# Altium PCB RelayBord.PcbDoc (part 2 of 2)
Units mm, origin at the board's own origin, x right, y up, seen from the top; angles counter-clockwise.
Board outline 155 x 100 mm, 2 copper layers (Top Layer, Bottom Layer); 259 components, 185 nets, 772 pads, 92 vias.
Unrouted connection lines stored in the file: 1.
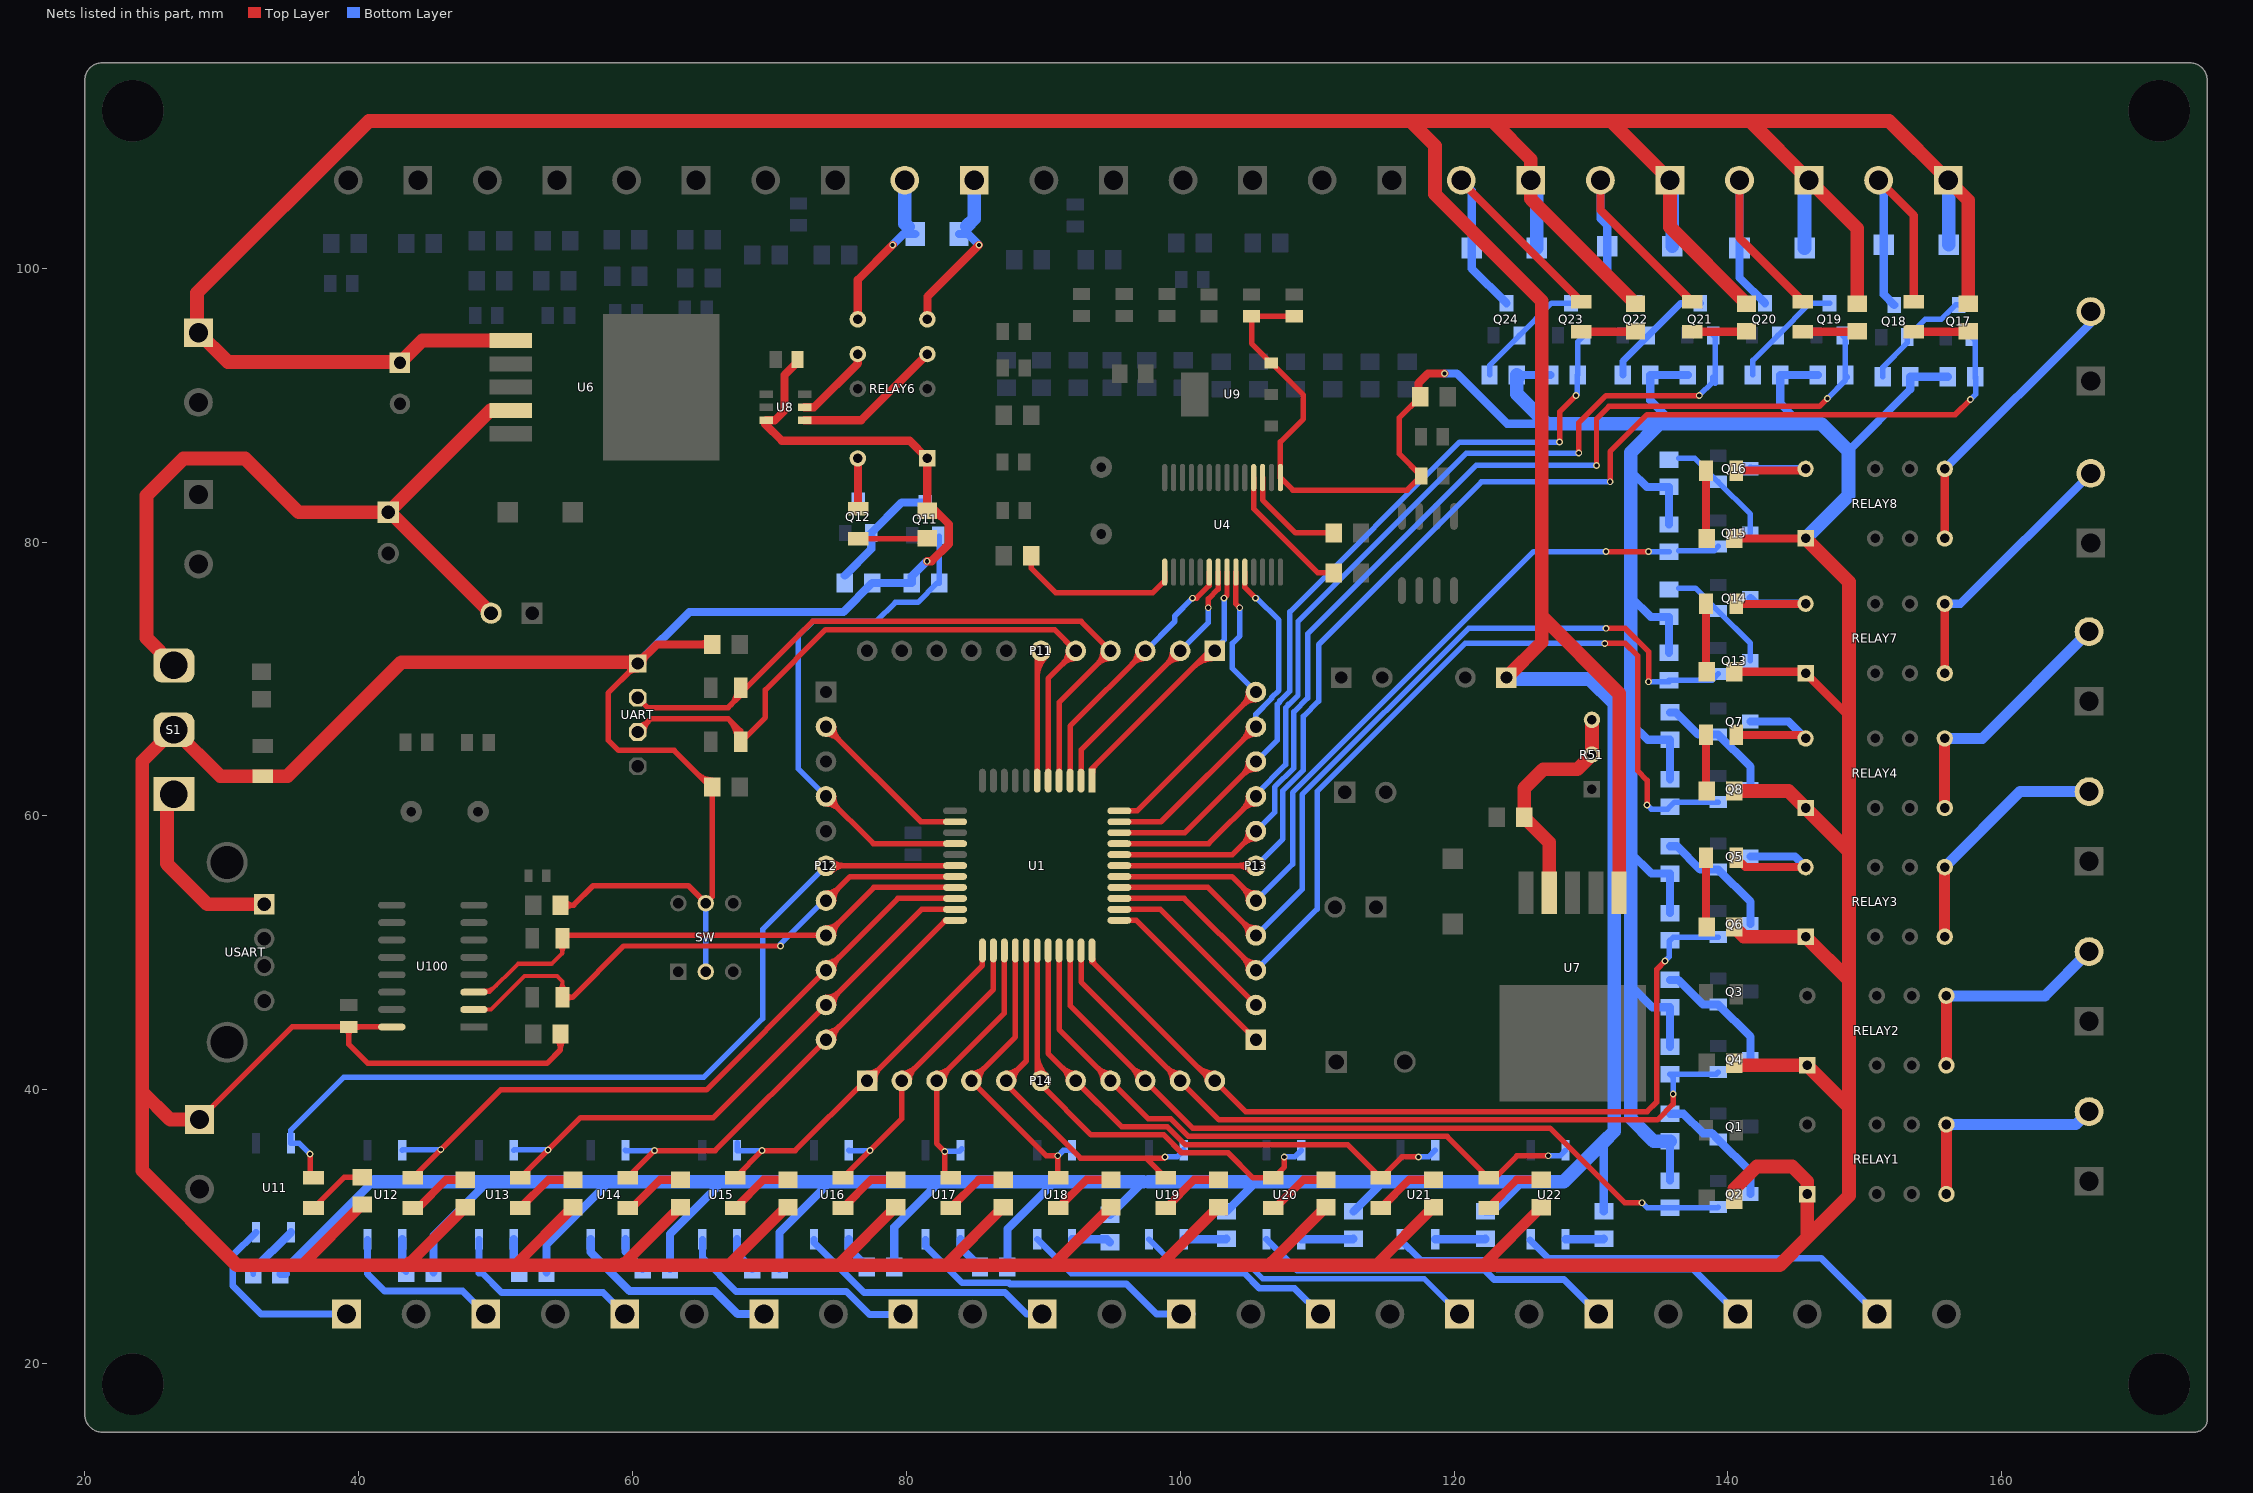
[diagram p2: the nets of this part, all layers, seen from the top]

## Via types
v1: diameter 0.5, hole 0.3, Top Layer to Bottom Layer, 70 vias
v2: diameter 0.4, hole 0.3, Top Layer to Bottom Layer, 18 vias
v3: diameter 2, hole 2, Top Layer to Bottom Layer, 4 vias

## Nets (pads, with @x,y where several pads share a name; then routed paths per layer and width w, separated by ;. In a path a pad name is that pad's centre, name@x,y a point inside that pad or via, vN(x,y) a via of type N, cw(c..) or ccw(c..) an arc to the next point about the centre after c; other vN are vias at no path point) (continued)
NetLED602_1: LED602.1 R13.1 | length 5.1
  Top Layer w0.6: LED602.1@138.402,56.928 138.402,51.939 R13.1@138.462,51.879
NetLED602_2: LED602.2 Q5.3 RELAY3.1 | length 9.7
  Top Layer w0.6: LED602.2@140.602,56.928 141.269,56.261 RELAY3.1@145.669,56.261
  Bottom Layer w0.6: Q5.3@141.637,57.035 144.895,57.035 RELAY3.1@145.669,56.261
NetLED603_1: LED603.1 R14.1 | length 4.1
  Top Layer w0.6: LED603.1@138.402,65.913 138.402,61.877 R14.1@138.462,61.817
NetLED603_2: LED603.2 Q7.3 RELAY4.1 | length 9.7
  Top Layer w0.6: LED603.2@140.602,65.913 145.415,65.913 RELAY4.1@145.669,65.659
  Bottom Layer w0.6: Q7.3@141.637,66.894 144.434,66.894 RELAY4.1@145.669,65.659
NetLED605_1: LED605.1 R16.2 | length 5
  Top Layer w0.4: LED605.1@76.476,80.233 R16.2@81.475,80.233
NetLED605_2: LED605.2 Q12.3 RELAY6.1 | length 6.6
  Top Layer w0.6: LED605.2@76.476,82.433 RELAY6.1@76.476,86.029
  Bottom Layer w0.4: Q12.3@76.486,83.009 RELAY6.1@76.486,86.039
NetLED606_1: LED606.1 R17.2 | length 5
  Top Layer w0.6: LED606.1@138.402,75.478 138.402,70.579 R17.2@138.452,70.529
NetLED606_2: LED606.2 Q14.3 RELAY7.1 | length 9.3
  Top Layer w0.6: LED606.2@140.602,75.478 145.646,75.478 RELAY7.1@145.669,75.501
  Bottom Layer w0.6: Q14.3@141.639,75.909 142.046,75.501 RELAY7.1@145.669,75.501
NetLED607_1: LED607.1 R18.2 | length 5
  Top Layer w0.6: LED607.1@138.402,85.217 138.402,80.318 R18.2@138.452,80.268
NetLED607_2: LED607.2 Q16.3 RELAY8.1 | length 9.2
  Top Layer w0.6: LED607.2@140.602,85.217 145.542,85.217 RELAY8.1@145.669,85.344
  Bottom Layer w0.6: Q16.3@141.639,85.348 141.643,85.344 RELAY8.1@145.669,85.344
NetLED608_1: LED608.1 R19.2 | length 3.9
  Top Layer w0.6: LED608.1@153.575,95.359 R19.2@157.493,95.359
NetLED609_1: LED609.1 R20.2 | length 3.9
  Top Layer w0.6: LED609.1@145.479,95.359 R20.2@149.397,95.359
NetLED610_1: LED610.1 R21.2 | length 3.9
  Top Layer w0.6: LED610.1@137.382,95.359 R21.2@141.301,95.359
NetLED611_1: LED611.1 R22.2 | length 3.9
  Top Layer w0.6: LED611.1@129.286,95.359 R22.2@133.204,95.359
NetLED720_1: LED720.1 R720.2 | length 4.5
  Top Layer w0.4: LED720.1@36.703,31.369 38.957,33.623 R720.2@40.259,33.623
NetLED721_1: LED721.1 R721.2 | length 4.7
  Top Layer w0.6: LED721.1@43.942,31.369 44.323,31.369 46.383,33.429 R721.2@47.791,33.429
NetLED722_1: LED722.1 R722.2 | length 4.7
  Top Layer w0.6: LED722.1@51.799,31.369 53.859,33.429 R722.2@55.648,33.429
NetLED723_1: LED723.1 R723.2 | length 4.7
  Top Layer w0.6: LED723.1@59.657,31.369 59.944,31.369 62.004,33.429 R723.2@63.506,33.429
NetLED724_1: LED724.1 R724.2 | length 4.7
  Top Layer w0.6: LED724.1@67.514,31.369 69.574,33.429 R724.2@71.363,33.429
NetLED725_1: LED725.1 R725.2 | length 4.7
  Top Layer w0.6: LED725.1@75.372,31.369 77.432,33.429 R725.2@79.22,33.429
NetLED726_1: LED726.1 R726.2 | length 4.7
  Top Layer w0.6: LED726.1@83.229,31.369 85.289,33.429 R726.2@87.078,33.429
NetLED727_1: LED727.1 R727.2 | length 4.7
  Top Layer w0.6: LED727.1@91.087,31.369 93.147,33.429 R727.2@94.935,33.429
NetLED728_1: LED728.1 R728.2 | length 4.7
  Top Layer w0.6: LED728.1@98.944,31.369 101.004,33.429 R728.2@102.793,33.429
NetLED729_1: LED729.1 R729.2 | length 4.7
  Top Layer w0.6: LED729.1@106.801,31.369 106.934,31.369 108.994,33.429 R729.2@110.65,33.429
NetLED730_1: LED730.1 R730.2 | length 4.7
  Top Layer w0.6: LED730.1@114.659,31.369 116.719,33.429 R730.2@118.508,33.429
NetLED731_1: LED731.1 R731.2 | length 4.7
  Top Layer w0.6: LED731.1@122.516,31.369 124.576,33.429 R731.2@126.365,33.429
NetQ1_1: Q1.1 Q2.3 R601.1 | length 9.3
  Bottom Layer w0.6: R601.1@135.763,38.243 136.763,38.243 138.176,36.83 138.822,36.83 Q1.1@139.287,36.365 141.637,34.015 Q2.3@141.637,32.385
NetQ3_1: Q3.1 Q4.3 R602.2 | length 9.2
  Bottom Layer w0.6: R602.2@135.763,48.02 136.384,48.02 138.179,46.225 Q3.1@139.287,46.225 141.637,43.875 Q4.3@141.637,42.245
NetQ5_1: Q5.1 Q6.3 R603.2 | length 9.2
  Bottom Layer w0.6: R603.2@135.763,57.788 136.268,57.788 137.971,56.085 Q5.1@139.287,56.085 141.637,53.735 Q6.3@141.637,52.105
NetQ7_1: Q7.1 Q8.3 R604.2 | length 9.1
  Bottom Layer w0.6: R604.2@135.763,67.555 136.216,67.555 137.826,65.944 Q7.1@139.287,65.944 141.637,63.594 Q8.3@141.637,61.964
NetQ11_3: Q11.3 Q12.1 R606.2 | length 8.7
  Bottom Layer w0.6: R606.2@75.502,77.548 77.436,79.482 Q12.1@77.436,80.659 79.659,82.882 Q11.3@81.312,82.882
NetQ13_3: Q13.3 Q14.1 R607.2 | length 8.2
  Bottom Layer w0.4: R607.2@136.4,76.635 137.613,76.635 Q14.1@139.289,74.959 141.639,72.609 Q13.3@141.639,71.316
NetQ15_3: Q15.3 Q16.1 R608.2 | length 8.3
  Bottom Layer w0.4: R608.2@136.4,86.126 137.561,86.126 Q16.1@139.289,84.398 141.639,82.048 Q15.3@141.639,80.628
NetQ17_3: Q17.3 Q18.1 R609.2 | length 8.4
  Bottom Layer w0.4: R609.2@151.312,92.075 151.312,92.765 153.091,94.544 Q18.1@153.091,94.964 154.393,96.266 155.575,96.266 156.623,97.314 Q17.3@156.861,97.314
NetQ19_3: Q19.3 Q20.1 R610.2 | length 8.4
  Bottom Layer w0.4: R610.2@141.822,92.202 141.822,93.26 Q20.1@143.653,95.091 146.003,97.441 Q19.3@147.422,97.441
NetQ21_3: Q21.3 Q22.1 R611.2 | length 8.4
  Bottom Layer w0.5: R611.2@132.331,92.202 132.331,93.209 Q22.1@134.214,95.091 136.564,97.441 Q21.3@137.983,97.441
NetQ23_3: Q23.3 Q24.1 R612.2 | length 8.5
  Bottom Layer w0.4: R612.2@122.587,92.202 122.587,92.903 Q24.1@124.775,95.091 127.125,97.441 Q23.3@128.544,97.441
NetR33_2: R33.2 U4.15 | length 12.4
  Top Layer w0.4: R33.2@89.126,78.994 89.126,78.074 90.9,76.3 98,76.3 98.865,77.165 U4.15@98.865,77.809
NetR50_1: R50.1 R51.2 R51.3 U7.4 | length 16.9
  Top Layer w1: U7.4@126.949,54.395 126.949,58.069 R50.1@125.113,59.905 125.113,62.013 126.5,63.4 128.989,63.4 R51.2@130.066,64.477 R51.3@130.066,67.017
NetR52_1: R52.1 RELAY6.7 RS.2 | length 12
  Top Layer w0.6: RELAY6.7@76.454,96.266 76.454,99.154 v1(79,101.7)
  Bottom Layer w0.6: v1(79,101.7) 79.789,102.489 R52.1@80.645,102.489
  Bottom Layer w1: RS.2@79.883,106.426 79.883,103.251 R52.1@80.117,103.017
NetR52_2: R52.2 RELAY6.8 RS.1 | length 12.4
  Top Layer w0.6: RELAY6.8@81.534,96.266 81.534,97.934 v1(85.3,101.7)
  Bottom Layer w0.6: R52.2@83.845,102.489 84.511,102.489 v1(85.3,101.7)
  Bottom Layer w1: R52.2@84.428,103.072 84.963,103.607 RS.1@84.963,106.426
NetR701_2: R701.2 U11.1 | length 4.2
  Bottom Layer w0.4: R701.2@32.29,26.543 R701.2@32.29,26.829
  Bottom Layer w0.6: R701.2@32.29,26.829 U11.1@35.052,29.591
NetR702_2: R702.2 U12.1 | length 2.5
  Bottom Layer w0.4: R702.2@43.18,26.956 R702.2@43.466,26.67
  Bottom Layer w0.6: R702.2@43.18,26.956 U12.1@43.18,29.083
NetR703_2: R703.2 U13.1 | length 2
  Bottom Layer w0.6: R703.2@51.333,27.058 U13.1@51.333,29.083
NetR704_2: R704.2 U14.1 | length 2.7
  Bottom Layer w0.6: U14.1@59.487,29.083 59.487,28.175 R704.2@60.738,26.924
NetR705_2: R705.2 U15.1 | length 2.6
  Bottom Layer w0.6: U15.1@67.64,29.083 67.64,28.023 R705.2@68.739,26.924
NetR706_2: R706.2 U16.1 | length 2.6
  Bottom Layer w0.6: U16.1@75.794,29.083 75.794,28.378 R706.2@77.121,27.051
NetR707_2: R707.2 U17.1 | length 2.6
  Bottom Layer w0.6: U17.1@83.947,29.083 83.947,28.48 R707.2@85.376,27.051
NetR708_2: R708.2 U18.1 | length 2.9
  Bottom Layer w0.6: U18.1@92.1,29.083 94.647,29.083 R708.2@94.869,28.861
NetR709_2: R709.2 U19.1 | length 3.1
  Bottom Layer w0.6: U19.1@100.254,29.083 103.346,29.083 R709.2@103.378,29.115
NetR710_2: R710.2 U20.1 | length 3.8
  Bottom Layer w0.6: U20.1@108.839,29.083 112.617,29.083 R710.2@112.649,29.115
NetR711_2: R711.2 U21.1 | length 3.7
  Bottom Layer w0.6: U21.1@118.618,29.083 122.269,29.083 R711.2@122.301,29.115
NetR712_2: R712.2 U22.1 | length 2.8
  Bottom Layer w0.6: U22.1@128.143,29.083 130.905,29.083 R712.2@130.937,29.115
NO1: RELAY1.7 RELAY1.8 Y0.2 | length 15.9
  Top Layer w0.8: RELAY1.8@155.956,32.385 RELAY1.7@155.956,37.465
  Bottom Layer w0.8: RELAY1.7@155.956,37.465 165.43,37.465 Y0.2@166.37,38.405
NO2: RELAY2.7 RELAY2.8 Y1.2 | length 16.8
  Top Layer w0.8: RELAY2.8@155.956,41.783 RELAY2.7@155.956,46.863
  Bottom Layer w0.8: RELAY2.7@155.956,46.863 163.144,46.863 Y1.2@166.37,50.089
NO3: RELAY3.7 RELAY3.8 Y2.2 | length 17.9
  Top Layer w0.8: RELAY3.8@155.829,51.181 RELAY3.7@155.829,56.261
  Bottom Layer w0.8: RELAY3.7@155.829,56.261 161.341,61.773 Y2.2@166.37,61.773
NO4: RELAY4.7 RELAY4.8 Y3.2 | length 18.9
  Top Layer w0.8: RELAY4.8@155.829,60.579 RELAY4.7@155.829,65.659
  Bottom Layer w0.8: RELAY4.7@155.829,65.659 158.572,65.659 Y3.2@166.37,73.457
NO7: RELAY7.7 RELAY7.8 Y4.2 | length 19.7
  Top Layer w0.6: RELAY7.8@155.829,70.421 RELAY7.7@155.829,75.501
  Bottom Layer w0.6: RELAY7.7@155.829,75.501 156.981,75.501 Y4.2@166.497,85.017
NO8: RELAY8.7 RELAY8.8 Y5.2 | length 21
  Top Layer w0.6: RELAY8.8@155.829,80.264 RELAY8.7@155.829,85.344
  Bottom Layer w0.6: RELAY8.7@155.829,85.344 166.497,96.012 Y5.2@166.497,96.836
P0.0: P13.7 Q19.1 R5.1 U1.40 | length 81.5
  Top Layer w0.4: U1.40@95.555,57.173 103.813,57.173 P13.7@105.53,58.89 P13.7@105.81,58.89 ; P13.7@104.98,58.89 cw(c103.652,58.89) 104.591,57.951 cw(c105.53,57.012) P13.7@105.53,58.34 ; v1(130.4,85.6) 130.4,89 131.3,89.9 146.669,89.9 v1(147.256,90.487)
  Bottom Layer w0.4: P13.7@105.53,58.89 106.9,60.26 106.9,62.094 108.298,63.492 108.298,67.598 109.3,68.6 109.3,73.3 121.6,85.6 v1(130.4,85.6) ; v1(147.256,90.487) 148.567,91.798 R5.1@148.567,92.202 ; Q19.1@148.372,95.091 148.567,94.896 R5.1@148.567,92.202 ; R5.1@148.717,92.052 R5.1@148.567,92.202
P0.1: P13.8 Q21.1 R6.1 U1.41 | length 70.6
  Top Layer w0.4: U1.41@95.555,57.973 102.073,57.973 P13.8@105.53,61.43 ; P13.8@104.98,61.43 cw(c103.652,61.43) 104.591,60.491 cw(c105.53,59.552) P13.8@105.53,60.88 ; v1(129.1,86.5) 129.1,88.7 131.1,90.7 v1(137.9,90.7)
  Bottom Layer w0.4: P13.8@105.53,61.43 105.53,61.573 107.698,63.74 107.698,67.894 107.88,68.077 ; 107.88,68.152 107.88,68.077 ; v1(129.1,86.5) 120.9,86.5 108.6,74.2 108.6,68.797 107.88,68.077 ; v1(137.9,90.7) 138.9,91.7 138.9,92.025 R6.1@139.077,92.202 ; Q21.1@138.933,95.091 139.077,94.948 R6.1@139.077,92.202 ; R6.1@139.077,91.579 R6.1@139.077,92.202
P0.2: P13.9 Q23.1 R7.1 U1.42 | length 59.7
  Top Layer w0.4: U1.42@95.555,58.773 100.333,58.773 P13.9@105.53,63.97 P13.9@105.53,63.979 ; P13.9@104.98,63.97 cw(c103.652,63.97) 104.591,63.031 cw(c105.53,62.092) P13.9@105.53,63.42 ; v1(127.7,87.3) 127.7,89.5 v1(128.9,90.7)
  Bottom Layer w0.3: R7.1@129.032,92.075 R7.1@129.032,92.202
  Bottom Layer w0.4: P13.9@105.53,63.97 107.098,65.538 107.098,68.143 107.28,68.325 107.28,68.4 108,69.12 108,74.9 120.4,87.3 v1(127.7,87.3) ; v1(128.9,90.7) 129,90.8 129,92.17 R7.1@129.032,92.202 129.032,94.629 Q23.1@129.494,95.091
P0.3: P13.10 U1.43 U4.24 | length 28
  Top Layer w0.4: U1.43@95.555,59.573 98.593,59.573 P13.10@105.53,66.51 ; U4.24@104.715,77.809 104.715,76.685 v1(105.5,75.9) ; P13.10@104.98,66.51 cw(c103.652,66.51) 104.591,65.571 cw(c105.53,64.632) P13.10@105.53,65.96
  Bottom Layer w0.4: v1(105.5,75.9) 105.5,75.91 105.505,75.915 105.585,75.915 107.2,74.3 107.2,69.169 106.68,68.649 106.68,68.574 105.53,67.424 P13.10@105.53,66.51
P0.4: P13.11 U1.44 U4.23 | length 25.5
  Top Layer w0.4: U1.44@95.555,60.373 96.853,60.373 P13.11@105.53,69.05 ; U4.23@104.065,77.809 104.065,75.485 v1(104.35,75.2) ; P13.11@104.98,69.05 cw(c103.652,69.05) 104.591,68.111 cw(c105.53,67.172) P13.11@105.53,68.5
  Bottom Layer w0.4: v1(104.35,75.2) 104.35,73.15 103.8,72.6 103.8,70.78 P13.11@105.53,69.05
P0.5: P11.1 U1.1 U4.22 | length 23
  Top Layer w0.3: U1.1@93.555,62.573 93.555,63.462 ; P11.1@102.143,72.05 P11.1@102.53,72.05
  Top Layer w0.4: 93.555,63.462 P11.1@102.143,72.05 ; U1.1@93.605,63.198 cw(c94.363,63.198) 93.827,63.734 ; 100.93,70.837 cw(c102.53,69.238) P11.1@102.53,71.5 ; 101.613,71.52 cw(c102.53,70.604) P11.1@102.53,71.9 ; v1(103.2,75.9) 103.415,76.115 U4.22@103.415,77.809
  Bottom Layer w0.4: P11.1@102.6,72.12 P11.1@102.53,72.05 102.53,72.179 103.2,72.849 v1(103.2,75.9)
P0.6: P11.2 U1.2 U4.21 | length 21.5
  Top Layer w0.4: U1.2@92.755,62.573 92.755,64.815 P11.2@99.99,72.05 ; P11.2@99.44,72.05 cw(c98.112,72.05) 99.051,71.111 cw(c99.99,70.172) P11.2@99.99,71.5 ; v1(102.05,75.2) 102.05,75.85 102.765,76.565 U4.21@102.765,77.809
  Bottom Layer w0.4: P11.2@99.99,72.05 102.05,74.11 v1(102.05,75.2)
P0.7: P11.3 U1.3 U4.20 | length 21.9
  Top Layer w0.4: U1.3@91.955,62.573 91.955,66.555 P11.3@97.45,72.05 P11.3@97.69,72.05 ; P11.3@96.9,72.05 cw(c95.572,72.05) 96.511,71.111 cw(c97.45,70.172) P11.3@97.45,71.5 ; v1(100.9,75.9) 101.2,75.9 102.115,76.815 U4.20@102.115,77.809
  Bottom Layer w0.4: P11.3@97.45,72.05 99.6,74.2 99.6,74.6 v1(100.9,75.9)
P2.0: LED731.2 P14.8 U1.30 U22.4 | length 50.5
  Top Layer w0.4: U1.30@91.155,50.173 91.155,44.405 P14.8@94.91,40.65 ; P14.8@94.36,40.65 ccw(c93.032,40.65) 93.971,41.589 ccw(c94.91,42.528) P14.8@94.91,41.2 ; P14.8@94.67,40.65 P14.8@94.91,40.65 ; LED731.2@122.555,33.608 LED731.2@122.516,33.569 ; v1(126.873,35.179) 124.587,35.179 122.977,33.569 LED731.2@122.516,33.569 ; P14.8@94.91,40.65 97.66,37.9 99.297,37.9 100.597,36.6 119.485,36.6 LED731.2@122.516,33.569
  Bottom Layer w0.4: v1(126.873,35.179) 127.739,35.179 U22.4@128.143,35.583
P2.1: P14.9 Q2.1 R26.1 U1.31 | length 59.8
  Top Layer w0.4: U1.31@91.955,50.173 91.955,46.145 P14.9@97.45,40.65 ; P14.9@96.9,40.65 ccw(c95.572,40.65) 96.511,41.589 ccw(c97.45,42.528) P14.9@97.45,41.2 ; P14.9@97.21,40.65 P14.9@97.45,40.65 ; v1(133.731,31.75) 132.45,31.75 127,37.2 100.9,37.2 P14.9@97.45,40.65
  Bottom Layer w0.4: v1(133.731,31.75) 134.112,31.369 R26.1@135.763,31.369 139.221,31.369 Q2.1@139.287,31.435
P2.2: P14.10 Q4.1 R27.1 U1.32 | length 58.1
  Top Layer w0.4: U1.32@92.755,50.173 92.755,47.885 P14.10@99.99,40.65 102.84,37.8 134.849,37.8 136,38.951 v1(136,39.7) ; P14.10@99.44,40.65 ccw(c98.112,40.65) 99.051,41.589 ccw(c99.99,42.528) P14.10@99.99,41.2
  Bottom Layer w0.4: v1(136,39.7) 136,40.899 R27.1@135.763,41.136 139.129,41.136 Q4.1@139.287,41.295
P2.3: P14.11 Q6.1 R45.1 U1.33 | length 66.3
  Top Layer w0.4: U1.33@93.555,50.173 93.555,49.365 102.27,40.65 P14.11@102.53,40.65 ; U1.33@93.605,49.548 ccw(c94.167,49.548) 93.77,49.15 ; 101.147,41.773 ccw(c102.53,43.156) P14.11@102.53,41.2 ; 101.775,41.145 cw(c101.28,40.65) P14.11@101.98,40.65 ; 101.83,41.09 ccw(c102.53,41.79) P14.11@102.53,40.8 ; P14.11@102.772,40.65 P14.11@102.53,40.65 ; v1(135.4,49.4) 134.8,48.8 134.8,39.1 134.1,38.4 104.78,38.4 P14.11@102.53,40.65
  Bottom Layer w0.4: v1(135.4,49.4) 135.7,49.7 135.7,50.841 R45.1@135.763,50.904 136.014,51.155 Q6.1@139.287,51.155
P2.4: P13.1 U1.34 | length 13.8
  Top Layer w0.4: U1.34@95.555,52.373 96.807,52.373 P13.1@105.53,43.65 P13.1@105.747,43.65
P2.5: P13.2 U1.35 | length 12.9
  Top Layer w0.4: U1.35@95.555,53.173 98.547,53.173 P13.2@105.53,46.19
P2.6: P13.3 Q8.1 R46.1 U1.36 | length 74.4
  Top Layer w0.4: U1.36@95.555,53.973 100.287,53.973 P13.3@105.53,48.73 P13.3@105.53,48.968 ; P13.3@104.98,48.73 ccw(c103.652,48.73) 104.591,49.669 ccw(c105.53,50.608) P13.3@105.53,49.28 ; v1(131,72.6) 132.5,72.6 133.4,71.7 133.4,63.3 134.1,62.6 v1(134.1,60.8)
  Bottom Layer w0.4: P13.3@105.53,48.73 110,53.2 110,61.8 120.8,72.6 v1(131,72.6) ; v1(134.1,60.8) 134.4,60.5 135.592,60.5 R46.1@135.763,60.671 136.106,61.014 Q8.1@139.287,61.014
P2.7: P13.4 Q13.1 R2.1 U1.37 | length 64.4
  Top Layer w0.4: U1.37@95.555,54.773 102.027,54.773 P13.4@105.53,51.27 P13.4@105.53,51.33 ; P13.4@104.98,51.27 ccw(c103.652,51.27) 104.591,52.209 ccw(c105.53,53.148) P13.4@105.53,51.82 ; v1(131.1,73.7) 132.5,73.7 134.2,72 v1(134.2,69.8)
  Bottom Layer w0.4: P13.4@105.53,51.27 108.9,54.64 108.9,61.549 121.051,73.7 v1(131.1,73.7) ; v1(134.2,69.8) 135.583,69.8 R2.1@135.7,69.917 ; R2.1@135.7,69.79 R2.1@135.7,69.917 ; Q13.1@138.94,70.017 Q13.1@139.289,70.366 138.84,69.917 R2.1@135.7,69.917
P3.2: LED721.2 P12.9 U1.20 U12.4 | length 51.7
  Top Layer w0.4: LED721.2@43.942,33.569 v1(45.998,35.625) 50.373,40 65.4,40 P12.9@74.13,48.73 ; P12.9@74.13,49.28 ccw(c74.13,50.608) 75.069,49.669 ; P12.9@74.68,48.73 cw(c76.008,48.73) 75.069,49.669 ; U1.20@83.555,53.973 79.373,53.973 75.069,49.669
  Bottom Layer w0.4: U12.4@43.18,35.583 43.222,35.625 v1(45.998,35.625)
P3.3: LED722.2 P12.10 U1.21 U13.4 | length 44.5
  Top Layer w0.4: LED722.2@51.799,33.569 v1(53.834,35.603) 56.203,37.973 65.913,37.973 P12.10@74.13,46.19 81.113,53.173 U1.21@83.555,53.173 ; P12.10@74.13,46.74 ccw(c74.13,48.068) 75.069,47.129 ccw(c76.008,46.19) P12.10@74.68,46.19
  Bottom Layer w0.4: U13.4@51.333,35.583 51.354,35.603 v1(53.834,35.603)
P3.4: LED723.2 P12.11 U1.22 U14.4 | length 34.8
  Top Layer w0.4: LED723.2@59.657,33.569 59.657,33.622 v1(61.595,35.56) 66.04,35.56 P12.11@74.13,43.65 ; P12.11@74.13,44.2 ccw(c74.13,45.528) 75.069,44.589 ; P12.11@74.68,43.65 cw(c76.008,43.65) 75.069,44.589 ; 82.713,52.233 cw(c82.93,52.016) U1.22@82.93,52.323 ; U1.22@83.555,52.373 82.853,52.373 75.069,44.589
  Bottom Layer w0.4: U14.4@59.487,35.583 59.51,35.56 v1(61.595,35.56)
P3.5: LED724.2 P14.1 U1.23 U15.4 | length 30.1
  Top Layer w0.4: LED724.2@67.514,33.569 67.514,33.605 v1(69.469,35.56) 71.882,35.56 76.972,40.65 P14.1@77.13,40.65 85.555,49.075 U1.23@85.555,50.173 ; P14.1@77.13,41.2 ccw(c77.13,42.528) 78.069,41.589 ccw(c79.008,40.65) P14.1@77.68,40.65
  Bottom Layer w0.4: U15.4@67.64,36.144 U15.4@67.64,35.583 67.663,35.56 v1(69.469,35.56)
P3.6: LED725.2 P14.2 U1.24 U16.4 | length 25.1
  Top Layer w0.4: LED725.2@75.372,33.569 75.372,33.589 v1(77.343,35.56) ; v1@77.38,35.56 v1(77.343,35.56) ; P14.2@79.67,41.2 ccw(c79.67,42.528) 80.609,41.589 ccw(c81.548,40.65) P14.2@80.22,40.65 ; U1.24@86.355,50.173 86.355,47.335 P14.2@79.67,40.65 79.67,37.887 v1(77.343,35.56)
  Bottom Layer w0.4: U16.4@75.794,35.583 75.817,35.56 v1(77.343,35.56) ; P14.2@79.43,40.65 P14.2@79.67,40.65
P3.7: LED726.2 P14.3 U1.25 U17.4 | length 23.4
  Top Layer w0.4: P14.3@81.776,40.65 P14.3@82.21,40.65 ; P14.3@82.21,41.2 ccw(c82.21,42.528) 83.149,41.589 ccw(c84.088,40.65) P14.3@82.76,40.65 ; LED726.2@83,33.798 LED726.2@83.229,33.569 ; LED726.2@83.229,33.572 LED726.2@83.229,33.569 ; U1.25@87.155,50.173 87.155,45.595 P14.3@82.21,40.65 ; P14.3@82.21,40.65 82.21,36.09 v1(82.8,35.5) 82.8,33.998 LED726.2@83.229,33.569
  Bottom Layer w0.4: P14.3@82.058,40.65 P14.3@82.21,40.65 ; v1(82.8,35.5) 83.864,35.5 U17.4@83.947,35.583 U17.4@84.051,35.687
P4.0: LED720.2 P12.6 U1.17 U11.4 | length 67.1
  Top Layer w0.4: v1(36.449,35.306) 36.449,33.823 LED720.2@36.703,33.569 LED720.2@36.83,33.696 ; P12.6@74.13,56.35 74.153,56.373 U1.17@83.555,56.373 ; P12.6@74.519,55.961 cw(c75.513,54.967) 75.513,56.373 ; P12.6@74.519,56.739 ccw(c75.402,57.622) 75.402,56.373
  Bottom Layer w0.4: v1(36.449,35.306) 35.664,36.091 U11.4@35.052,36.091 35.052,37.052 38.9,40.9 65.2,40.9 69.5,45.2 69.5,51.72 P12.6@74.13,56.35
P4.1: LED727.2 P14.4 U1.26 U18.4 | length 24.6
  Top Layer w0.4: P14.4@84.75,41.2 ccw(c84.75,42.528) 85.689,41.589 ccw(c86.628,40.65) P14.4@85.3,40.65 ; U1.26@87.955,50.173 87.955,43.855 P14.4@84.75,40.65 90.221,35.179 v1(91.059,35.179) 91.059,33.597 LED727.2@91.087,33.569 LED727.2@91.354,33.569
  Bottom Layer w0.4: v1(91.059,35.179) 91.463,35.583 U18.4@92.1,35.583 U18.4@92.123,35.56
P4.2: LED728.2 P14.5 U1.27 U19.4 | length 30.3
  Top Layer w0.4: P14.5@87.16,40.52 P14.5@87.29,40.39 ; P14.5@87.29,41.2 ccw(c87.29,42.528) 88.229,41.589 ccw(c89.168,40.65) P14.5@87.84,40.65 ; U1.27@88.755,50.173 88.755,42.115 P14.5@87.29,40.65 87.29,40.41 92.7,35 97.513,35 ; v1(98.9,35.1) 98.8,35 97.513,35 ; LED728.2@99.06,33.685 LED728.2@98.944,33.569 97.513,35
  Bottom Layer w0.4: v1(98.9,35.1) 99.771,35.1 U19.4@100.254,35.583 U19.4@100.203,35.634
P4.3: LED729.2 P14.6 U1.28 U20.4 | length 35.9
  Top Layer w0.4: 89.555,41.676 ccw(c90.856,41.676) P14.6@89.936,40.756 ; 89.555,42.642 ccw(c91.822,42.642) P14.6@90.219,41.039 ; U1.28@89.555,50.173 89.555,40.925 P14.6@89.83,40.65 89.83,40.37 93.5,36.7 98.8,36.7 100.1,35.4 103.5,35.4 105.331,33.569 LED729.2@106.801,33.569 107.6,34.368 v1(107.6,35.1)
  Bottom Layer w0.4: v1(107.6,35.1) 108.356,35.1 U20.4@108.839,35.583 U20.4@108.8,35.544
P4.4: LED730.2 P14.7 U1.29 U21.4 | length 42.5
  Top Layer w0.4: U1.29@90.355,50.173 90.355,42.665 P14.7@92.37,40.65 95.72,37.3 99.049,37.3 100.349,36 112.228,36 LED730.2@114.659,33.569 116.19,35.1 v1(117.4,35.1) ; P14.7@91.82,40.65 ccw(c90.492,40.65) 91.431,41.589 ccw(c92.37,42.528) P14.7@92.37,41.2
  Bottom Layer w0.4: v1(117.4,35.1) 118.135,35.1 U21.4@118.618,35.583
P4.5: P13.5 Q15.1 R3.1 U1.38 | length 59.6
  Top Layer w0.4: U1.38@95.555,55.573 103.767,55.573 P13.5@105.53,53.81 ; P13.5@104.98,53.81 ccw(c103.652,53.81) 104.591,54.749 ccw(c105.53,55.688) P13.5@105.53,54.36 ; v1(131.1,79.3) v1(134.2,79.3)
  Bottom Layer w0.4: P13.5@105.53,53.81 108.2,56.48 108.2,61.697 125.803,79.3 v1(131.1,79.3) ; v1(134.2,79.3) 135.68,79.3 R3.1@135.7,79.28 ; R3.1@136.4,79.38 138.991,79.38 Q15.1@139.289,79.678
P4.6: P13.6 Q17.1 R4.1 U1.39 | length 91.5
  Top Layer w0.4: U1.39@95.555,56.373 P13.6@105.507,56.373 ; 104.147,56.373 cw(c104.147,54.967) P13.6@105.141,55.961 ; 104.258,56.373 ccw(c104.258,57.622) P13.6@105.141,56.739 ; P13.6@105.53,56.35 P13.6@105.679,56.201 ; v1(131.4,84.4) 131.4,86.6 134.1,89.3 156.6,89.3 v1(157.7,90.4)
  Bottom Layer w0.4: P13.6@105.53,56.35 107.5,58.32 107.5,61.846 109,63.346 109,67.275 110.1,68.375 110.1,72.5 122,84.4 v1(131.4,84.4) ; v1(157.7,90.4) 158.1,90.8 R4.1@158.1,92.002 ; Q17.1@157.811,94.964 158.057,94.718 R4.1@158.057,92.075 158.1,92.032 R4.1@158.1,92.002 ; R4.1@158.057,91.96 R4.1@158.1,92.002 ; R4.1@158.115,92.017 R4.1@158.1,92.002
P4.7: P11.6 U1.6 | length 12.6
  Top Layer w0.4: U1.6@89.555,62.573 89.555,71.775 P11.6@89.83,72.05 ; 89.555,70.058 cw(c91.822,70.058) P11.6@90.219,71.661 ; 89.555,71.024 cw(c90.856,71.024) P11.6@89.936,71.944
  Bottom Layer w0.4: P11.6@89.83,72.05 P11.6@90.07,72.05
P5.4: P12.2 U1.13 | length 14.4
  Top Layer w0.4: P12.2@74.13,65.96 cw(c74.13,64.632) 75.069,65.571 cw(c76.008,66.51) P12.2@74.68,66.51 ; P12.2@74.13,66.51 81.067,59.573 U1.13@83.555,59.573
P5.5: P12.4 Q11.1 R1.1 U1.15 | length 40.8
  Top Layer w0.4: P12.4@74.13,60.88 cw(c74.13,59.552) 75.069,60.491 cw(c76.008,61.43) P12.4@74.68,61.43 ; P12.4@74.13,61.43 77.587,57.973 U1.15@83.555,57.973
  Bottom Layer w0.4: P12.4@74.13,61.43 72.1,63.46 72.1,73.122 73.178,74.2 77.79,74.2 79.19,75.6 ; 79.343,75.6 79.19,75.6 ; R1.1@82.386,77.008 82.251,77.008 80.843,75.6 79.19,75.6 ; R1.1@82.386,77.142 Q11.1@82.386,80.408
POWER_OUT: C10.1 C12.1 D605.2 D606.2 D607.2 D608.2 POWER.1 R19.1 R20.1 R21.1 R22.1 R701.1 R702.1 R703.1 R704.1 R705.1 R706.1 R707.1 R708.1 R709.1 R710.1 R711.1 R712.1 U6.1 U7.1 Y8.1 Y9.1 Y10.1 Y11.1 | length 519.5
  Top Layer w1: U6.1@51.105,94.717 44.642,94.717 C10.1@43.016,93.091 42.957,93.15 30.45,93.15 28.2,95.4 28.2,98.2 40.744,110.744 116.8,110.744 ; C12.1@123.825,70.104 126.4,72.679 126.4,74.6 ; U7.1@132.055,54.395 132.055,68.945 126.4,74.6 ; R22.1@133.254,97.409 125.603,105.06 Y11.1@125.603,106.426 125.603,107.941 122.8,110.744 ; R21.1@141.351,97.409 135.763,102.997 Y10.1@135.763,106.426 131.445,110.744 ; R20.1@149.447,97.409 149.447,102.902 Y9.1@145.923,106.426 141.605,110.744 ; R19.1@157.543,97.409 157.543,104.966 Y8.1@156.083,106.426 151.765,110.744 141.605,110.744 ; 116.8,110.744 122.8,110.744 ; 116.8,110.744 118.6,108.944 118.6,105.4 126.4,97.6 126.4,74.6 ; 122.8,110.744 131.445,110.744 ; 131.445,110.744 141.605,110.744
  Bottom Layer w0.6: R701.1@34.671,26.543 R701.1@34.29,26.543 41.021,33.274 41.148,33.274 ; R702.1@45.466,26.67 45.466,29.337 49.403,33.274 ; R703.1@53.721,26.67 53.721,28.702 58.293,33.274 ; R704.1@62.738,26.924 62.738,29.464 66.548,33.274 ; R705.1@70.739,26.924 70.739,29.591 74.422,33.274 ; R706.1@79.121,27.051 79.121,29.972 82.423,33.274 ; R707.1@87.376,27.051 87.376,29.845 90.805,33.274 ; R708.1@94.869,30.861 97.282,33.274 97.663,33.274 ; R709.1@103.378,31.115 105.537,33.274 ; R710.1@112.649,31.115 114.808,33.274 114.935,33.274 ; R711.1@122.301,31.115 122.809,31.115 124.968,33.274 ; R712.1@130.937,31.115 130.937,36.211
  Bottom Layer w1: 41.148,33.274 49.403,33.274 58.293,33.274 66.548,33.274 74.422,33.274 82.423,33.274 90.805,33.274 97.282,33.274 ; 97.663,33.274 105.537,33.274 114.808,33.274 ; 114.935,33.274 124.968,33.274 128,33.274 130.937,36.211 131.7,36.974 131.7,68.2 129.9,70 C12.1@123.825,70 ; Y11.1@125.603,106.426 126.035,105.994 D608.2@126.035,101.473 ; Y10.1@135.763,106.426 135.941,106.248 D607.2@135.941,101.6 ; D606.2@145.593,101.473 145.593,106.096 Y9.1@145.923,106.426 ; Y8.1@156.083,106.426 156.134,106.375 D605.2@156.134,101.727
PVCC: C11.1 L10.2 S1.3 U6.4 | length 57.6
  Top Layer w1: S1.3@26.501,70.993 24.5,72.994 24.5,83.4 27.2,86.1 31.7,86.1 35.631,82.169 C11.1@42.164,82.169 ; L10.2@49.668,74.803 42.302,82.169 C11.1@42.164,82.169 ; U6.4@49.717,89.611 U6.4@51.105,89.611 49.606,89.611 C11.1@42.164,82.169
RS+: RELAY6.4 U8.4 | length 11
  Top Layer w0.6: U8.4@72.568,88.895 76.703,88.895 RELAY6.4@81.534,93.726
RS-: RELAY6.3 U8.5 | length 5.9
  Top Layer w0.6: U8.5@72.568,89.845 73.245,89.845 76.454,93.054 RELAY6.3@76.454,93.726
RXD1: LED302.2 P12.7 U1.18 U100.2 | length 46.1
  Top Layer w0.3: U100.2@48.422,45.858 49.658,45.858 52.1,48.3 54.5,48.3 54.88,47.92 LED302.2@54.88,46.747 ; LED302.2@54.633,47.244 ccw(c54.035,47.842) 54.88,47.842 ccw(c55.725,47.842) LED302.2@55.127,47.244
  Top Layer w0.4: LED302.2@54.88,46.747 55.604,46.747 ; LED302.2@55.092,46.535 cw(c55.604,46.023) 55.604,46.747 ; LED302.2@55.092,46.959 ccw(c55.604,47.471) 55.604,46.747 ; v1(70.8,50.5) 59.357,50.5 55.604,46.747 ; P12.7@74.13,53.435 P12.7@74.13,53.81 75.893,55.573 U1.18@83.555,55.573 ; P12.7@74.13,54.36 ccw(c74.13,55.688) 75.069,54.749 ccw(c76.008,53.81) P12.7@74.68,53.81
  Bottom Layer w0.4: v1(70.8,50.5) 70.8,50.63 73.98,53.81 P12.7@74.13,53.81
RXD2: LED304.2 P11.4 U1.4 UART.2 | length 52.4
  Top Layer w0.4: UART.2@60.376,68.628 61.101,67.903 66.98,67.903 LED304.2@67.91,68.833 ; 67.209,68.132 ccw(c66.241,69.1) LED304.2@67.61,69.1 ; LED304.2@67.91,69.35 68.301,69.35 73.151,74.2 92.76,74.2 P11.4@94.91,72.05 ; U1.4@91.155,62.573 91.155,68.295 P11.4@94.91,72.05 ; P11.4@94.36,72.05 cw(c93.032,72.05) 93.971,71.111 cw(c94.91,70.172) P11.4@94.91,71.5 ; P11.4@94.91,72.14 P11.4@94.91,72.05
TXD1: LED301.2 P12.8 U1.19 U100.3 | length 42.8
  Top Layer w0.3: U100.3@48.422,47.128 49.565,47.128 51.637,49.2 54.1,49.2 54.88,49.98 LED301.2@54.88,50.557 ; U100.3@49.172,47.228 ccw(c49.172,48.418) 50.014,47.577 ; LED301.2@54.633,50.568 cw(c54.035,49.97) 54.88,49.97 cw(c55.725,49.97) LED301.2@55.127,50.568
  Top Layer w0.4: LED301.2@54.88,51.065 55.13,51.065 55.335,51.27 P12.8@74.13,51.27 77.633,54.773 U1.19@83.555,54.773 ; P12.8@74.13,51.82 ccw(c74.13,53.148) 75.069,52.209 ccw(c76.008,51.27) P12.8@74.68,51.27
TXD2: LED303.2 P11.5 U1.5 UART.3 | length 56.1
  Top Layer w0.4: UART.3@60.376,66.128 61.351,67.103 66.98,67.103 67.91,66.173 ; UART.3@60.376,66.578 ccw(c60.376,67.664) 61.144,66.896 ccw(c61.912,66.128) UART.3@60.826,66.128 ; 67.037,67.046 cw(c65.654,65.663) LED303.2@67.61,65.663 ; 67.72,66.363 cw(c67.02,65.663) LED303.2@68.01,65.663 ; LED303.2@67.764,65.925 ccw(c67.627,66.173) 67.91,66.173 ; 67.91,66.21 67.91,66.173 ; LED303.2@68.056,65.925 cw(c68.193,66.173) 67.91,66.173 ; U1.5@90.355,62.573 90.355,70.035 P11.5@92.37,72.05 ; P11.5@91.82,72.05 cw(c90.492,72.05) 91.431,71.111 cw(c92.37,70.172) P11.5@92.37,71.5 ; P11.5@92.079,72.05 P11.5@92.37,72.05 ; 67.91,66.173 LED303.2@67.91,65.413 69.7,67.203 69.7,69.2 74.1,73.6 90.82,73.6 P11.5@92.37,72.05
USB5V: S1.1 USART.1 | length 13.6
  Top Layer w1: S1.1@26.501,61.593 26,61.093 26,56.5 28.962,53.538 USART.1@33.105,53.538
VCC: 5V.1 C15.1 C17.1 C18.1 C39.1 C303.1 LED20.1 R1.2 R2.2 R3.2 R4.2 R5.2 R6.2 R7.2 R11.2 R12.2 R13.2 R14.2 R16.1 R17.1 R18.1 R26.2 R27.2 R30.1 R45.2 R46.2 R301.2 R302.2 R303.1 R304.1 R601.2 R602.1 R603.1 R604.1 R606.1 R607.1 R608.1 R609.1 R610.1 R611.1 R612.1 R720.1 R721.1 R722.1 R723.1 R724.1 R725.1 R726.1 R727.1 R728.1 R729.1 R730.1 R731.1 RELAY1.2 RELAY2.2 RELAY3.2 RELAY4.2 RELAY6.2 RELAY7.2 RELAY8.2 S1.2 SW.2 SW.5 U4.1 U8.3 U9.3 U100.16 UART.1 | length 727
  Top Layer w0.4: 5V.1@28.386,37.827 35.147,44.588 C303.1@39.278,44.588 ; C303.1@39.101,44.411 cw(c38.674,43.984) 39.278,43.984 cw(c39.882,43.984) C303.1@39.455,44.411 ; C303.1@39.63,44.411 cw(c40.057,43.984) 40.057,44.588 cw(c40.057,45.192) C303.1@39.63,44.765 ; U100.16@42.422,44.588 C303.1@39.278,44.588 ; R302.2@54.457,43.697 cw(c53.774,43.014) 54.74,43.014 cw(c55.706,43.014) R302.2@55.023,43.697 ; R302.2@54.74,44.08 54.74,42.922 53.739,41.921 40.675,41.921 39.278,43.318 C303.1@39.278,44.588 ; R301.2@55.023,53.195 cw(c55.706,52.512) 55.706,53.478 ; R301.2@55.023,53.761 ccw(c55.706,54.444) 55.706,53.478 ; UART.1@59.926,71.128 cw(c58.84,71.128) 59.608,70.36 cw(c60.376,69.592) UART.1@60.376,70.678 ; UART.1@59.995,70.747 58.217,68.969 58.217,65.54 58.979,64.778 63.043,64.778 65.71,62.111 R303.1@65.837,62.111 ; 64.767,63.054 ccw(c65.837,64.125) R303.1@65.837,62.611 ; R303.1@65.71,61.984 R303.1@65.837,62.111 ; C17.1@108.324,96.483 C18.1@105.213,96.483 105.213,94.511 U9.3@106.642,93.082 106.656,93.082 109,90.738 109,89 107.315,87.315 U4.1@107.315,84.709 108.224,83.8 116.566,83.8 C39.1@117.602,84.836 116,86.438 116,89.082 R30.1@117.528,90.61 ; R30.1@117.528,90.617 R30.1@117.528,91.028 ; RELAY4.2@145.669,60.579 RELAY4.2@145.669,60.706 ; 55.706,53.478 57.128,54.9 64.074,54.9 SW.5@65.349,53.625 65.837,54.113 R303.1@65.837,62.111
  Top Layer w0.6: UART.1@60.376,71.128 61.773,72.525 R304.1@65.837,72.525 ; UART.1@60.376,71.478 ccw(c60.376,72.323) 60.973,71.725 ccw(c61.571,71.128) UART.1@60.726,71.128 ; R304.1@65.625,72.313 ccw(c65.113,71.801) 65.113,72.525 ccw(c65.113,73.249) R304.1@65.625,72.737 ; U8.3@69.7,88.827 69.7,88.6 70.9,87.4 80.24,87.4 RELAY6.2@81.525,86.115 ; U8.3@69.768,88.895 70.395,88.895 71.1,89.6 71.1,92.199 72.054,93.153 C15.1@72.054,93.335 ; v1(81.5,78.6) 81.849,78.6 83.1,79.851 83.1,81.3 82.117,82.283 R16.1@81.525,82.283 RELAY6.2@81.525,86.115 ; RELAY6.2@81.525,86.125 RELAY6.2@81.525,86.115 ; RELAY6.2@81.534,86.106 RELAY6.2@81.525,86.115 ; R30.1@117.528,90.61 117.4,90.738 117.4,91.6 118.1,92.3 v1(119.3,92.3) ; R17.1@140.452,70.529 145.561,70.529 RELAY7.2@145.669,70.421 148.79,67.3 148.844,67.3 ; R18.1@140.452,80.268 145.665,80.268 RELAY8.2@145.669,80.264
  Top Layer w0.8: 35.814,27.178 R720.1@40.259,31.623 ; 43.688,27.326 R721.1@47.791,31.429 ; 51.435,27.216 R722.1@55.648,31.429 ; 59.309,27.232 R723.1@63.506,31.429 ; 67.056,27.232 R724.1@71.253,31.429 ; 74.969,27.178 R725.1@79.22,31.429 ; 82.827,27.178 R726.1@87.078,31.429 ; 90.932,27.426 R727.1@94.935,31.429 ; 98.542,27.178 R728.1@102.793,31.429 ; 106.68,27.459 R729.1@110.65,31.429 ; 114.3,27.221 R730.1@118.508,31.429 ; 122.114,27.178 R731.1@126.365,31.429
  Top Layer w1: 5V.1@28.386,37.827 26.233,37.827 24.2,39.86 ; 43.688,27.326 43.688,27.178 ; 59.309,27.232 59.309,27.178 ; UART.1@59.926,71.128 UART.1@60.376,71.128 ; UART.1@60.376,71.228 43.13,71.228 34.807,62.905 LED20.1@32.98,62.905 29.889,62.905 S1.2@26.501,66.293 24.2,63.993 24.2,39.86 ; R11.2@140.462,32.004 140.462,32.762 142.1,34.4 144.7,34.4 145.796,33.304 RELAY1.2@145.796,32.385 145.796,29.21 ; R12.2@140.462,41.942 140.621,41.783 RELAY2.2@145.796,41.783 148.717,38.862 148.844,38.862 ; R13.2@140.462,51.879 141.16,51.181 RELAY3.2@145.669,51.181 148.844,48.006 ; R14.2@140.462,61.817 144.431,61.817 RELAY4.2@145.669,60.579 148.844,57.404 ; RELAY8.2@145.669,80.264 148.844,77.089 148.844,67.3 148.844,57.404 ; 24.2,39.86 24.2,34.1 31.122,27.178 35.814,27.178 43.688,27.178 ; 43.688,27.178 59.309,27.178 ; 59.309,27.178 74.969,27.178 82.827,27.178 98.542,27.178 122.114,27.178 143.764,27.178 145.796,29.21 ; 145.796,29.21 148.844,32.258 148.844,38.862 ; 148.844,38.862 148.844,48.006 ; 148.844,48.006 148.844,57.404
  Bottom Layer w0.4: SW.2@65.349,48.625 SW.5@65.349,53.625 ; 132.7,42.3 132.9,42.3 ; 132.9,86.546 133.18,86.546
  Bottom Layer w0.6: UART.1@60.376,71.128 64.148,74.9 75.401,74.9 77.502,77.001 R606.1@77.502,77.008 R1.2@80.386,77.008 80.386,77.486 v1(81.5,78.6) ; v1(119.3,92.3) 120.2,92.3 123.854,88.646 126.746,88.646 ; R612.1@124.587,92.202 R7.2@127.032,92.202 ; 132.9,47.6 134.48,46.02 R602.1@135.763,46.02 R27.2@135.763,43.136 ; 132.9,57.3 134.412,55.788 R603.1@135.763,55.788 R45.2@135.763,52.904 ; 132.9,59.3 132.9,59.5 ; 132.9,66.8 134.145,65.555 R604.1@135.763,65.555 R46.2@135.763,62.671 ; 132.9,76 134.365,74.535 R607.1@135.7,74.535 R2.2@135.7,71.917 ; 132.9,85.2 134.074,84.026 R608.1@135.7,84.026 R3.2@135.7,81.28 ; R611.1@134.331,92.202 134.331,90.332 136.017,88.646 ; R611.1@134.366,92.202 R6.2@137.077,92.202 ; R26.2@135.763,33.369 R601.2@135.763,36.243 ; 144.907,88.646 144.907,89.027 143.822,90.112 R610.1@143.822,92.202 R5.2@146.567,92.202 ; 148.8,86.646 153.312,91.158 R609.1@153.312,92.075 R4.2@156.057,92.075
  Bottom Layer w1: R612.1@124.714,92.075 R612.1@124.587,92.202 124.587,90.805 126.746,88.646 135,88.646 ; 132.9,59.3 132.9,57.3 132.9,47.6 132.9,42.3 132.9,37.915 134.572,36.243 R601.2@135.763,36.243 ; 132.9,59.5 132.9,66.8 132.9,76 132.9,81 ; 132.9,81.226 132.9,85.2 132.9,86.546 135,88.646 ; RELAY8.2@145.669,80.264 148.8,83.395 148.8,86.646 146.8,88.646 144.907,88.646 136.017,88.646 135,88.646
VREF: R31.2 U4.4 | length 10.1
  Top Layer w0.4: U4.4@105.365,84.709 105.365,82.435 110.052,77.748 R31.2@111.203,77.748
VREFN: R29.2 U4.3 | length 7.8
  Top Layer w0.4: U4.3@106.015,84.709 106.015,83.085 108.431,80.669 R29.2@111.203,80.669
X0: U11.2 X0.1 | length 13.8
  Bottom Layer w0.5: U11.2@32.512,29.591 30.8,27.879 30.8,25.7 32.878,23.622 X0.1@39.116,23.622
X1: U12.2 X1.1 | length 12.4
  Bottom Layer w0.5: U12.2@40.64,29.083 40.64,26.56 41.9,25.3 47.598,25.3 X1.1@49.276,23.622
X2: U13.2 X2.1 | length 14.4
  Bottom Layer w0.5: U13.2@48.793,29.083 48.793,26.6 49.034,26.6 50.434,25.2 57.858,25.2 X2.1@59.436,23.622
X3: U14.2 X3.1 | length 15.5
  Bottom Layer w0.6: U14.2@56.947,29.083 56.947,28.143 59.79,25.3 66,25.3 67.678,23.622 X3.1@69.596,23.622
X4: U15.2 X4.1 | length 17.7
  Bottom Layer w0.5: U15.2@65.1,29.083 65.1,27.737 67.564,25.273 75.627,25.273 77.3,23.6 79.734,23.6 X4.1@79.756,23.622
X5: U16.2 X5.1 | length 19.1
  Bottom Layer w0.5: U16.2@73.254,29.083 73.254,28.846 76.899,25.201 87.199,25.201 88.778,23.622 X5.1@89.916,23.622
X6: U17.2 X6.1 | length 22
  Bottom Layer w0.5: U17.2@81.407,29.083 81.407,28.575 84.081,25.901 87.489,25.901 87.568,25.822 96.078,25.822 98.278,23.622 X6.1@100.882,23.622
X7: U18.2 X7.1 | length 22.9
  Bottom Layer w0.5: U18.2@89.56,29.083 92.043,26.6 104.7,26.6 105.8,25.5 108.358,25.5 X7.1@110.236,23.622
X8: U19.2 X8.1 | length 24.9
  Bottom Layer w0.4: U19.2@97.714,29.083 99.547,27.25 104.969,27.25 106.019,26.2 117.818,26.2 X8.1@120.396,23.622
X9: U20.2 X9.1 | length 26.5
  Bottom Layer w0.5: U20.2@106.299,29.083 108.532,26.85 122.209,26.85 122.909,26.15 128.028,26.15 X9.1@130.556,23.622
X10: U21.2 X10.1 | length 26.9
  Bottom Layer w0.5: U21.2@116.033,29.083 116.056,29.061 117.566,27.55 122.499,27.55 123.149,26.9 137.438,26.9 X10.1@140.716,23.622
X11: U22.2 X11.1 | length 27.6
  Bottom Layer w0.5: U22.2@125.539,29.019 126.859,27.7 146.798,27.7 X11.1@150.876,23.622
Y8: D605.1 LED608.2 Q18.3 Y8.2 | length 19.5
  Top Layer w0.6: Y8.2@151.003,106.426 153.575,103.854 LED608.2@153.575,97.559
  Bottom Layer w0.6: Y8.2@151.003,106.426 151.384,106.045 D605.1@151.384,101.727 151.384,98.072 Q18.3@152.141,97.314
Y9: D606.1 LED609.2 Q20.3 Y9.2 | length 20.5
  Top Layer w0.6: Y9.2@140.843,106.426 140.843,102.195 LED609.2@145.479,97.559
  Bottom Layer w0.6: Y9.2@140.843,106.426 D606.1@140.843,101.473 140.843,99.301 Q20.3@142.703,97.441
Y10: D607.1 LED610.2 Q22.3 Y10.2 | length 21.7
  Top Layer w0.6: Y10.2@130.683,106.426 130.683,104.258 LED610.2@137.382,97.559
  Bottom Layer w0.6: Y10.2@130.683,106.426 130.683,103.617 131.191,103.109 D607.1@131.191,101.6 131.191,99.514 Q22.3@133.264,97.441
Y11: D608.1 LED611.2 Q24.3 Y11.2 | length 22.8
  Top Layer w0.6: Y11.2@120.523,106.426 120.523,106.322 LED611.2@129.286,97.559
  Bottom Layer w0.6: Y11.2@120.523,106.426 121.285,105.664 D608.1@121.285,101.473 121.285,99.981 Q24.3@123.825,97.441
pads on no net: RELAY6.5 RELAY6.6 SW.1 SW.4 U2.1 U2.2 U2.3 U2.5 U2.6 U2.7 U4.25 U4.26 U4.27 U4.28 U11.0 U12.0 U13.0 U14.0 U15.0 U16.0 U17.0 U18.0 U19.0 U20.0 U21.0 U22.0 U100.9 U100.10 U100.11 U100.12 U100.13 U100.14 U100.15 USART.NC
copper on no net:
  other v3: 74.378,40.856 105.366,40.856 74.378,71.844 105.366,71.844

## Polygon pours and split planes (outlines as drawn)
GND on Top Layer "GND" (solid, remove dead copper): 32.3,113.6 21.3,102.6 21.3,28 21.6,27.7 33,16.3 33.2,16.3 161.2,16.3 173.7,28.8 173.7,99.9 160,113.6
GND on Bottom Layer "GND" (solid, remove dead copper): 32.3,113.6 21.3,102.6 21.3,28 21.4,27.9 33,16.3 161.2,16.3 173.7,28.8 173.7,99.9 160,113.6

## Keep-outs
Keep-Out Layer:
  lines w0.2: 20,16.27 ccw(c21.27,16.27) 21.27,15 31.27,15 143.73,15 174.077,15 ccw(c174.077,15.923) 175,15.923 175,16.383 175,31.27 175,110.871 175,113.73 ccw(c173.73,113.73) 173.73,115 143.73,115 31.27,115 21.27,115 ccw(c21.27,113.73) 20,113.73 20,31.27 20,21.27 20,16.27

## Silkscreen, mask and mechanical layers (free items; w line width, h text height)
Top Overlay:
  drawing of 163 lines, arcs and shapes, not listed
  text "-" at 151.3,113.3 h1.2 r180
  text "GND" at 102.148,113.284 h1.1 r180
  text "GND" at 71.2,113.2 h1.1 r180
  text "RS-" at 81.2,113.2 h1.1 r180
  text "+" at 84.4,113.2 h1.1 r180
  text "GND" at 91.5,113.2 h1.1 r180
  text "+" at 116.3,113.2 h1.2 r180
  text "-" at 120.8,113.2 h1.2 r180
  text "-" at 130.8,113.2 h1.2 r180
  text "-" at 141,113.2 h1.2 r180
  text "GND" at 40.6,113.1 h1 r180
  text "AD6" at 50.6,113.1 h1 r180
  text "AD4" at 60.9,113.1 h1 r180
  text "+" at 136.5,112.2 h1.2 r90
  text "+" at 146.7,112.2 h1.2 r90
  text "+" at 156.8,112.2 h1.2 r90
  text "+" at 126.3,112.1 h1.2 r90
  text "-" at 109.3,112 h1.2
  text "ADS1256" at 110.8,96.2 h2
  text "24V" at 21.582,96.172 h1 r270
  text "INPUT" at 34.3,93.4 h1 r270
  text "GND" at 21.582,91.092 h1 r270
  text "3.3V" at 109.7,87.8 h1 r90
  text "OUTPUT" at 34.4,83.3 h1 r270
  text "GND" at 21.404,79.537 h1 r270
  text "V1.2" at 58.4,78.7 h4
  text "5V" at 21.582,71.499 h1 r270
  text "VCC" at 54.788,70.747 h0.8
  text "RXD" at 54.661,68.334 h0.8
  text "NC" at 21.582,66.8 h1 r270
  text "TXD" at 54.534,65.794 h0.8
  text "GND" at 54.534,63.127 h0.8
  text "24V" at 21.455,62.609 h1 r270
  text "X9" at 104.7,35.8 h1.1
  text "X0" at 35.814,35.56 h1.1
  text "X1" at 43.596,35.56 h1.1
  text "X2" at 51.377,35.56 h1.1
  text "X3" at 59.159,35.56 h1.1
  text "X4" at 66.941,35.56 h1.1
  text "X5" at 74.722,35.56 h1.1
  text "X6" at 82.504,35.56 h1.1
  text "X7" at 90.285,35.56 h1.1
  text "X8" at 98.067,35.56 h1.1
  text "GND" at 21.591,33.637 h1 r270
  text "X10" at 113.3,29.3 h1.1
  text "X11" at 121.2,29.3 h1.1
  text "OUTPUT" at 21.4,28.6 h1
  text "GND" at 83.4,16.9 h1
  text "GND" at 134.2,16.9 h1
  text "GND" at 144.6,16.9 h1
  text "GND" at 154.7,16.9 h1
  text "GND" at 42.7,16.8 h1
  text "GND" at 53.1,16.8 h1
  text "GND" at 63.2,16.8 h1
  text "GND" at 73.3,16.8 h1
  text "GND" at 94,16.8 h1
  text "GND" at 103.3,16.8 h1
  text "GND" at 114.2,16.8 h1
  text "GND" at 124.4,16.8 h1
Bottom Overlay:
  lines w0.2: 101.6,89.5 118.1,89.5 118.1,96.8 101.6,96.8 101.6,89.5
  text "ADS1256" at 113.2,95.6 h0.8

## Dimensions
20,113.73 to 175,110.871 on Top Overlay
31.27,115 to 31.27,15 on Top Overlay

## Text inside footprints (layer, text, board x,y; h text height)
USART: Top Overlay "USB2.0_A" at 29.56,53.368 h1 r270